# EAGLE board LilyPad_SimplePower_Panel_v21 (EAGLE 6.6.0), part 1 of 3
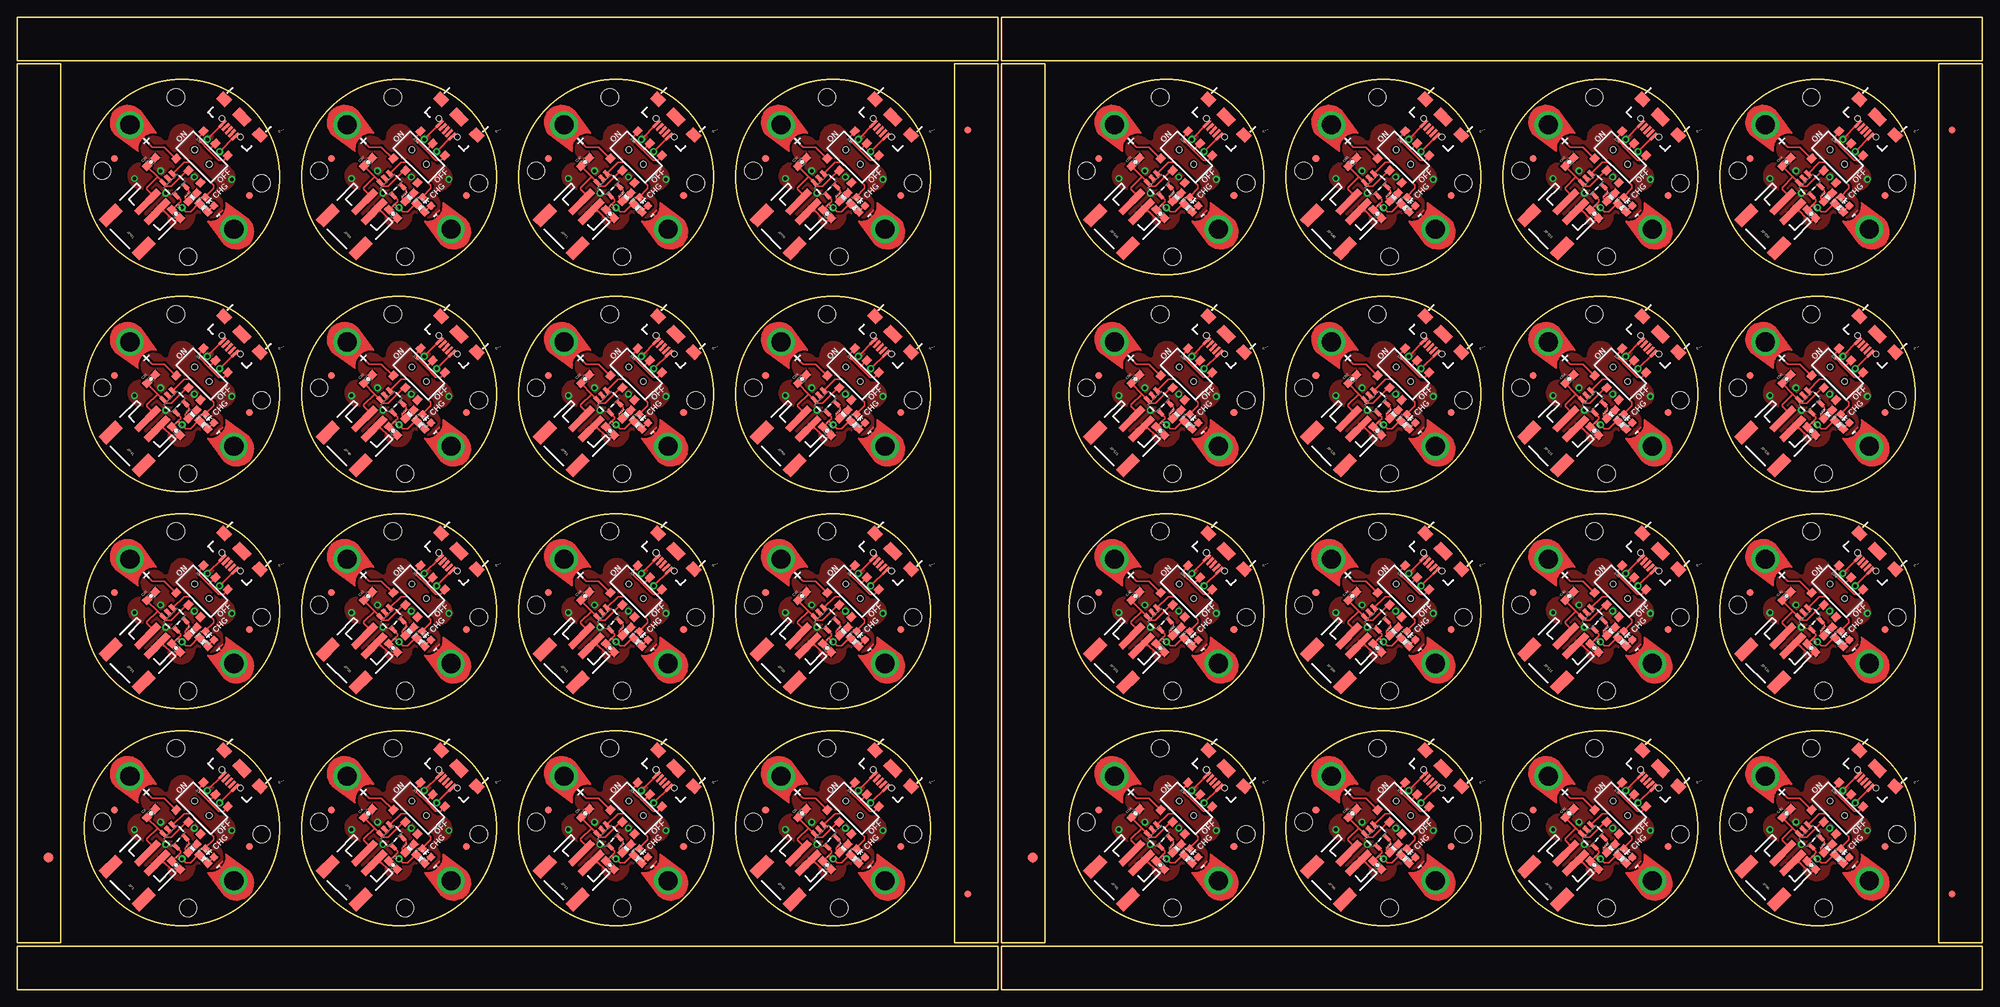
[diagram p0: board, top side]
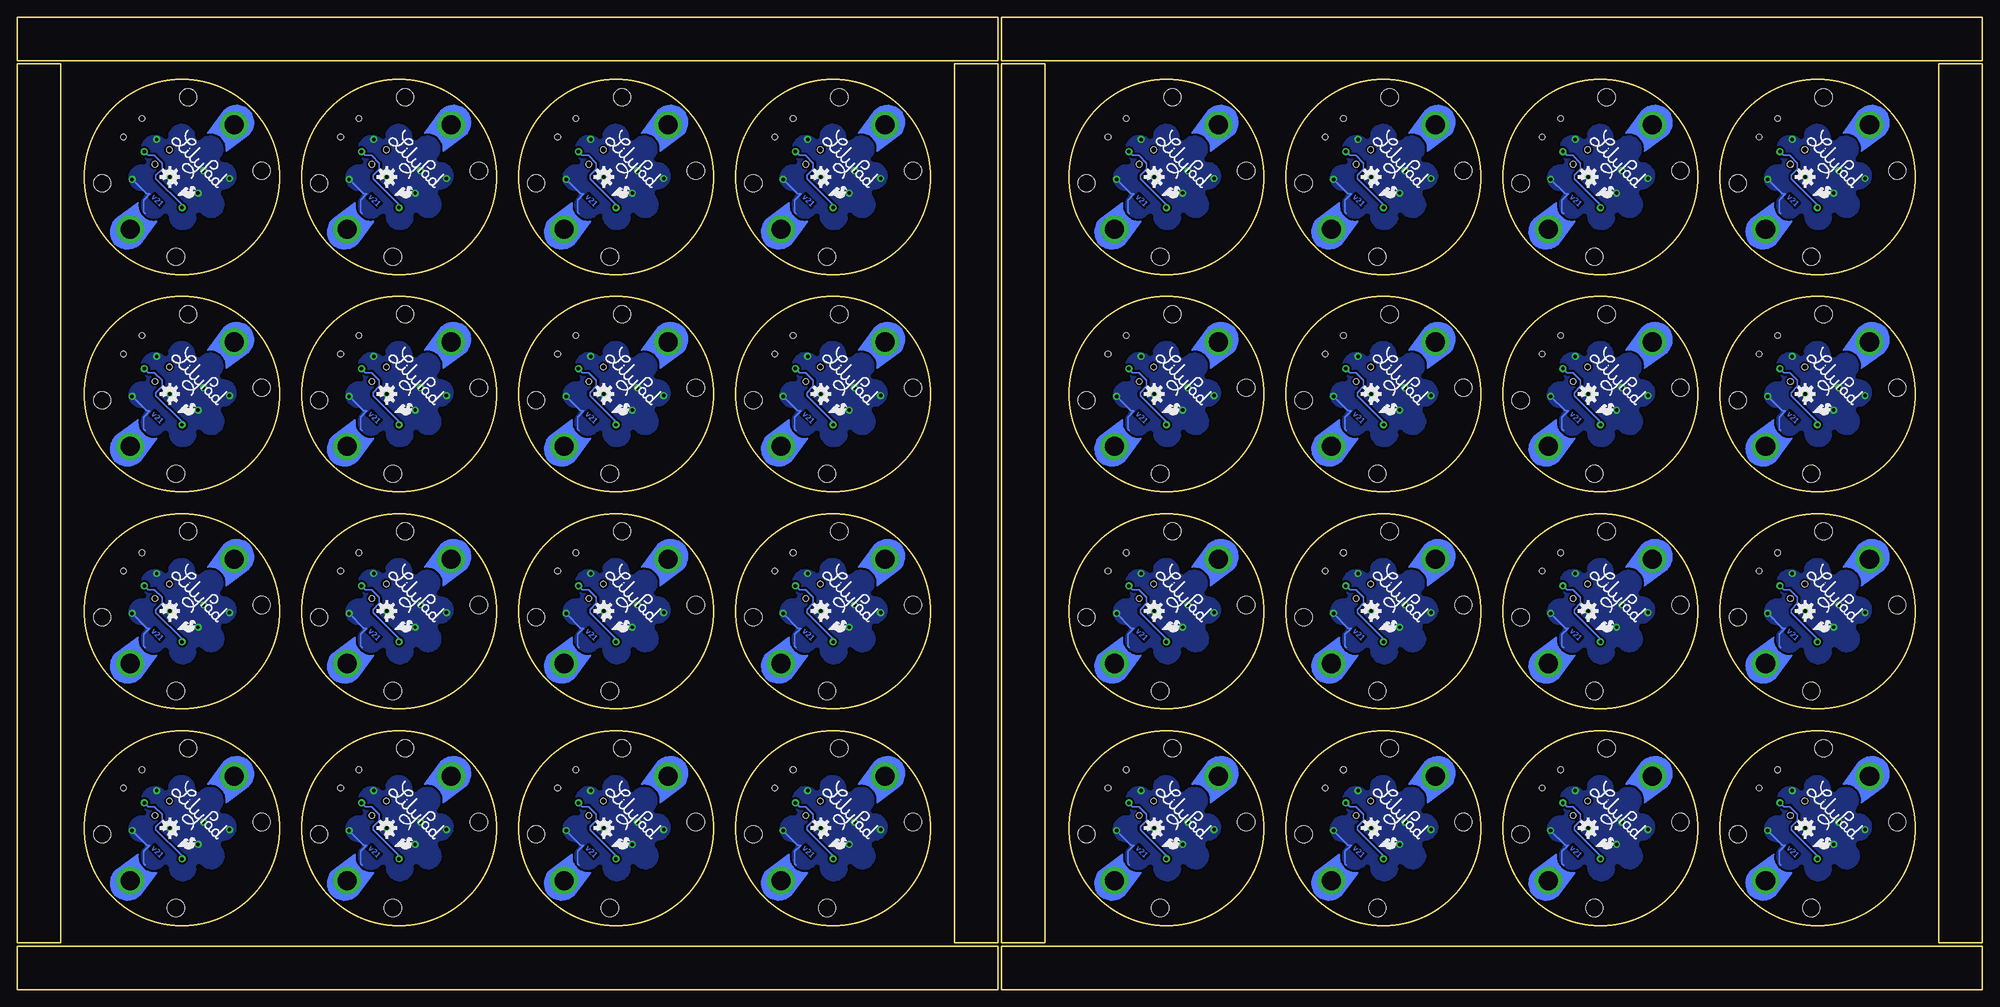
[diagram p1: board, bottom side, seen from below]

Size 287.53 x 142.24 mm. Coordinates in mm from the lower left corner, seen from the top.
Outline: 6.35,6.86 6.35,135.38 0,135.38 0,6.86 6.35,6.86
Outline: 0,0 143.51,0 143.51,6.35 0,6.35 0,0
Outline: 143.51,6.86 143.51,135.38 137.16,135.38 137.16,6.86 143.51,6.86
Outline: 143.51,142.24 0,142.24 0,135.89 143.51,135.89 143.51,142.24
Outline: 150.37,6.86 150.37,135.38 144.02,135.38 144.02,6.86 150.37,6.86
Outline: 144.02,0 287.53,0 287.53,6.35 144.02,6.35 144.02,0
Outline: 287.53,6.86 287.53,135.38 281.18,135.38 281.18,6.86 287.53,6.86
Outline: 287.53,142.24 144.02,142.24 144.02,135.89 287.53,135.89 287.53,142.24
Outline: circle at 24.13,23.6 radius 14.22
Outline: circle at 55.88,23.6 radius 14.22
Outline: circle at 87.63,23.6 radius 14.22
Outline: circle at 119.38,23.6 radius 14.22
Outline: circle at 24.13,55.35 radius 14.22
Outline: circle at 55.88,55.35 radius 14.22
Outline: circle at 87.63,55.35 radius 14.22
Outline: circle at 119.38,55.35 radius 14.22
Outline: circle at 24.13,87.1 radius 14.22
Outline: circle at 55.88,87.1 radius 14.22
Outline: circle at 87.63,87.1 radius 14.22
Outline: circle at 119.38,87.1 radius 14.22
Outline: circle at 24.13,118.85 radius 14.22
Outline: circle at 55.88,118.85 radius 14.22
Outline: circle at 87.63,118.85 radius 14.22
Outline: circle at 119.38,118.85 radius 14.22
Outline: circle at 168.15,23.6 radius 14.22
Outline: circle at 199.9,23.6 radius 14.22
Outline: circle at 231.65,23.6 radius 14.22
Outline: circle at 263.4,23.6 radius 14.22
Copper layers (1*16): Top 0.035mm / dielectric 1.5mm / Bottom 0.035mm
Design rules "SparkFun-2-layer": minimum track width 7mil, minimum drill 15mil, track to track 8mil, track to pad 8mil, pad to pad 8mil, via to via 8mil, smd to smd 8mil, copper to edge 8mil, drill to drill 8mil, minimum pad ring 12mil, minimum via ring 10mil, stop-mask expansion 4mil, vias tented up to drill 20mil, thermal gap 10mil
tRestrict: area 12.8,12.3 to 35.5,34.9; area 44.6,12.3 to 67.2,34.9; area 76.3,12.3 to 99,34.9; area 108.1,12.3 to 130.7,34.9; area 12.8,44 to 35.5,66.7; area 44.6,44 to 67.2,66.7; area 76.3,44 to 99,66.7; area 108.1,44 to 130.7,66.7; area 12.8,75.8 to 35.5,98.4; area 44.6,75.8 to 67.2,98.4; area 76.3,75.8 to 99,98.4; area 108.1,75.8 to 130.7,98.4; 20 more areas; 256 lines
bRestrict: area 12.8,12.3 to 35.5,34.9; area 44.6,12.3 to 67.2,34.9; area 76.3,12.3 to 99,34.9; area 108.1,12.3 to 130.7,34.9; area 12.8,44 to 35.5,66.7; area 44.6,44 to 67.2,66.7; area 76.3,44 to 99,66.7; area 108.1,44 to 130.7,66.7; area 12.8,75.8 to 35.5,98.4; area 44.6,75.8 to 67.2,98.4; area 76.3,75.8 to 99,98.4; area 108.1,75.8 to 130.7,98.4; 20 more areas; 256 lines

## Footprints (pad centres in the part's own frame; a part is rotated, then mirrored left to right if it is on the bottom)
0603-CAP = smd 1.1 x 1: 1 -0.85,0; 2 0.85,0
LED-0603 = smd 1 x 1: A 0,-0.877; C 0,0.877
FIDUCIAL-1.5X3 = smd 1.5 x 1.5: 1 0,0
FIDUCIAL-1X2 = smd 1 x 1: 1 0,0
JST-2-SMD = smd 1 x 4.6: 1 -1,-3.7; 2 1,-3.7 | smd 1.6 x 3.4: NC1 -3.4,1.5; NC2 3.4,1.5
PETAL-LONG-1-2SIDE = drill 2.794 pad 4.064: 1 0.03,0
USB-B-MICRO-SMD_V03 = smd 1.4 x 0.4: D+1 2.7,0; D-1 2.7,0.65; GND1 2.7,-1.3; ID1 2.7,-0.65; VBUS1 2.7,1.3 | smd 1.5 x 1.8: SHIELD1 0,3.7; SHIELD2 0,-3.7 | smd 1.5 x 2.5: SHIELD3 0,0 | hole 0.85: 2.2,1.9; 2.2,-1.9
0603-RES = smd 1.1 x 1: 1 -0.85,0; 2 0.85,0
AYZ0202 = smd 1 x 1.15: 1 -2.5,2.825; 2 0,2.825; 3 2.5,2.825; 4 -2.5,-2.825; 5 0,-2.825; 6 2.5,-2.825 | hole 0.85: 1.5,0; -1.5,0
SEW-HOLE-NO-PAD = hole 2.54: 0,0
SOT23-5 = smd 0.55 x 1.2: 1 -0.95,-1.3; 2 0,-1.3; 3 0.95,-1.3; 4 0.95,1.3; 5 -0.95,1.3

## Placement (x,y rotation side)
C1  4.7uF  [0603-CAP]  23.23,18.22 315 top
C2  4.7uF  [0603-CAP]  19.59,25.8 45 top
C3  4.7uF  [0603-CAP]  54.98,18.22 315 top
C4  4.7uF  [0603-CAP]  51.34,25.8 45 top
C5  4.7uF  [0603-CAP]  86.73,18.22 315 top
C6  4.7uF  [0603-CAP]  83.09,25.8 45 top
C7  4.7uF  [0603-CAP]  118.48,18.22 315 top
C8  4.7uF  [0603-CAP]  114.84,25.8 45 top
C9  4.7uF  [0603-CAP]  23.23,49.97 315 top
C10  4.7uF  [0603-CAP]  19.59,57.55 45 top
C11  4.7uF  [0603-CAP]  54.98,49.97 315 top
C12  4.7uF  [0603-CAP]  51.34,57.55 45 top
C13  4.7uF  [0603-CAP]  86.73,49.97 315 top
C14  4.7uF  [0603-CAP]  83.09,57.55 45 top
C15  4.7uF  [0603-CAP]  118.48,49.97 315 top
C16  4.7uF  [0603-CAP]  114.84,57.55 45 top
C17  4.7uF  [0603-CAP]  23.23,81.72 315 top
C18  4.7uF  [0603-CAP]  19.59,89.3 45 top
C19  4.7uF  [0603-CAP]  54.98,81.72 315 top
C20  4.7uF  [0603-CAP]  51.34,89.3 45 top
C21  4.7uF  [0603-CAP]  86.73,81.72 315 top
C22  4.7uF  [0603-CAP]  83.09,89.3 45 top
C23  4.7uF  [0603-CAP]  118.48,81.72 315 top
C24  4.7uF  [0603-CAP]  114.84,89.3 45 top
C25  4.7uF  [0603-CAP]  23.23,113.47 315 top
C26  4.7uF  [0603-CAP]  19.59,121.05 45 top
C27  4.7uF  [0603-CAP]  54.98,113.47 315 top
C28  4.7uF  [0603-CAP]  51.34,121.05 45 top
C29  4.7uF  [0603-CAP]  86.73,113.47 315 top
C30  4.7uF  [0603-CAP]  83.09,121.05 45 top
C31  4.7uF  [0603-CAP]  118.48,113.47 315 top
C32  4.7uF  [0603-CAP]  114.84,121.05 45 top
C33  4.7uF  [0603-CAP]  167.25,18.22 315 top
C34  4.7uF  [0603-CAP]  163.61,25.8 45 top
C35  4.7uF  [0603-CAP]  199,18.22 315 top
C36  4.7uF  [0603-CAP]  195.36,25.8 45 top
C37  4.7uF  [0603-CAP]  230.75,18.22 315 top
C38  4.7uF  [0603-CAP]  227.11,25.8 45 top
C39  4.7uF  [0603-CAP]  262.5,18.22 315 top
C40  4.7uF  [0603-CAP]  258.86,25.8 45 top
C41  4.7uF  [0603-CAP]  167.25,49.97 315 top
C42  4.7uF  [0603-CAP]  163.61,57.55 45 top
C43  4.7uF  [0603-CAP]  199,49.97 315 top
C44  4.7uF  [0603-CAP]  195.36,57.55 45 top
C45  4.7uF  [0603-CAP]  230.75,49.97 315 top
C46  4.7uF  [0603-CAP]  227.11,57.55 45 top
C47  4.7uF  [0603-CAP]  262.5,49.97 315 top
C48  4.7uF  [0603-CAP]  258.86,57.55 45 top
C49  4.7uF  [0603-CAP]  167.25,81.72 315 top
C50  4.7uF  [0603-CAP]  163.61,89.3 45 top
C51  4.7uF  [0603-CAP]  199,81.72 315 top
C52  4.7uF  [0603-CAP]  195.36,89.3 45 top
C53  4.7uF  [0603-CAP]  230.75,81.72 315 top
C54  4.7uF  [0603-CAP]  227.11,89.3 45 top
C55  4.7uF  [0603-CAP]  262.5,81.72 315 top
C56  4.7uF  [0603-CAP]  258.86,89.3 45 top
C57  4.7uF  [0603-CAP]  167.25,113.47 315 top
C58  4.7uF  [0603-CAP]  163.61,121.05 45 top
C59  4.7uF  [0603-CAP]  199,113.47 315 top
C60  4.7uF  [0603-CAP]  195.36,121.05 45 top
C61  4.7uF  [0603-CAP]  230.75,113.47 315 top
C62  4.7uF  [0603-CAP]  227.11,121.05 45 top
C63  4.7uF  [0603-CAP]  262.5,113.47 315 top
C64  4.7uF  [0603-CAP]  258.86,121.05 45 top
D1  Yellow  [LED-0603]  28.17,20.01 45 top
D2  Yellow  [LED-0603]  59.92,20.01 45 top
D3  Yellow  [LED-0603]  91.67,20.01 45 top
D4  Yellow  [LED-0603]  123.42,20.01 45 top
D5  Yellow  [LED-0603]  28.17,51.76 45 top
D6  Yellow  [LED-0603]  59.92,51.76 45 top
D7  Yellow  [LED-0603]  91.67,51.76 45 top
D8  Yellow  [LED-0603]  123.42,51.76 45 top
D9  Yellow  [LED-0603]  28.17,83.51 45 top
D10  Yellow  [LED-0603]  59.92,83.51 45 top
D11  Yellow  [LED-0603]  91.67,83.51 45 top
D12  Yellow  [LED-0603]  123.42,83.51 45 top
D13  Yellow  [LED-0603]  28.17,115.26 45 top
D14  Yellow  [LED-0603]  59.92,115.26 45 top
D15  Yellow  [LED-0603]  91.67,115.26 45 top
D16  Yellow  [LED-0603]  123.42,115.26 45 top
D17  Yellow  [LED-0603]  172.19,20.01 45 top
D18  Yellow  [LED-0603]  203.94,20.01 45 top
D19  Yellow  [LED-0603]  235.69,20.01 45 top
D20  Yellow  [LED-0603]  267.44,20.01 45 top
D21  Yellow  [LED-0603]  172.19,51.76 45 top
D22  Yellow  [LED-0603]  203.94,51.76 45 top
D23  Yellow  [LED-0603]  235.69,51.76 45 top
D24  Yellow  [LED-0603]  267.44,51.76 45 top
D25  Yellow  [LED-0603]  172.19,83.51 45 top
D26  Yellow  [LED-0603]  203.94,83.51 45 top
D27  Yellow  [LED-0603]  235.69,83.51 45 top
D28  Yellow  [LED-0603]  267.44,83.51 45 top
D29  Yellow  [LED-0603]  172.19,115.26 45 top
D30  Yellow  [LED-0603]  203.94,115.26 45 top
D31  Yellow  [LED-0603]  235.69,115.26 45 top
D32  Yellow  [LED-0603]  267.44,115.26 45 top
E$1  [FIDUCIAL-1.5X3]  4.57,19.3 0 top
E$2  [FIDUCIAL-1X2]  283.08,13.97 0 top
E$3  [FIDUCIAL-1X2]  283.08,125.73 180 top
E$4  [FIDUCIAL-1X2]  139.06,13.97 0 top
E$5  [FIDUCIAL-1X2]  139.06,125.73 180 top
E$6  [FIDUCIAL-1.5X3]  148.59,19.3 0 top
FID1  FIDUCIAL1X2  [FIDUCIAL-1X2]  14.25,26.3 45 top
FID2  FIDUCIAL1X2  [FIDUCIAL-1X2]  34.01,20.91 45 top
FID3  FIDUCIAL1X2  [FIDUCIAL-1X2]  46,26.3 45 top
FID4  FIDUCIAL1X2  [FIDUCIAL-1X2]  65.76,20.91 45 top
FID5  FIDUCIAL1X2  [FIDUCIAL-1X2]  77.75,26.3 45 top
FID6  FIDUCIAL1X2  [FIDUCIAL-1X2]  97.51,20.91 45 top
FID7  FIDUCIAL1X2  [FIDUCIAL-1X2]  109.5,26.3 45 top
FID8  FIDUCIAL1X2  [FIDUCIAL-1X2]  129.26,20.91 45 top
FID9  FIDUCIAL1X2  [FIDUCIAL-1X2]  14.25,58.05 45 top
FID10  FIDUCIAL1X2  [FIDUCIAL-1X2]  34.01,52.66 45 top
FID11  FIDUCIAL1X2  [FIDUCIAL-1X2]  46,58.05 45 top
FID12  FIDUCIAL1X2  [FIDUCIAL-1X2]  65.76,52.66 45 top
FID13  FIDUCIAL1X2  [FIDUCIAL-1X2]  77.75,58.05 45 top
FID14  FIDUCIAL1X2  [FIDUCIAL-1X2]  97.51,52.66 45 top
FID15  FIDUCIAL1X2  [FIDUCIAL-1X2]  109.5,58.05 45 top
FID16  FIDUCIAL1X2  [FIDUCIAL-1X2]  129.26,52.66 45 top
FID17  FIDUCIAL1X2  [FIDUCIAL-1X2]  14.25,89.8 45 top
FID18  FIDUCIAL1X2  [FIDUCIAL-1X2]  34.01,84.41 45 top
FID19  FIDUCIAL1X2  [FIDUCIAL-1X2]  46,89.8 45 top
FID20  FIDUCIAL1X2  [FIDUCIAL-1X2]  65.76,84.41 45 top
FID21  FIDUCIAL1X2  [FIDUCIAL-1X2]  77.75,89.8 45 top
FID22  FIDUCIAL1X2  [FIDUCIAL-1X2]  97.51,84.41 45 top
FID23  FIDUCIAL1X2  [FIDUCIAL-1X2]  109.5,89.8 45 top
FID24  FIDUCIAL1X2  [FIDUCIAL-1X2]  129.26,84.41 45 top
FID25  FIDUCIAL1X2  [FIDUCIAL-1X2]  14.25,121.55 45 top
FID26  FIDUCIAL1X2  [FIDUCIAL-1X2]  34.01,116.16 45 top
FID27  FIDUCIAL1X2  [FIDUCIAL-1X2]  46,121.55 45 top
FID28  FIDUCIAL1X2  [FIDUCIAL-1X2]  65.76,116.16 45 top
FID29  FIDUCIAL1X2  [FIDUCIAL-1X2]  77.75,121.55 45 top
FID30  FIDUCIAL1X2  [FIDUCIAL-1X2]  97.51,116.16 45 top
FID31  FIDUCIAL1X2  [FIDUCIAL-1X2]  109.5,121.55 45 top
FID32  FIDUCIAL1X2  [FIDUCIAL-1X2]  129.26,116.16 45 top
FID33  FIDUCIAL1X2  [FIDUCIAL-1X2]  158.27,26.3 45 top
FID34  FIDUCIAL1X2  [FIDUCIAL-1X2]  178.03,20.91 45 top
FID35  FIDUCIAL1X2  [FIDUCIAL-1X2]  190.02,26.3 45 top
FID36  FIDUCIAL1X2  [FIDUCIAL-1X2]  209.78,20.91 45 top
FID37  FIDUCIAL1X2  [FIDUCIAL-1X2]  221.77,26.3 45 top
FID38  FIDUCIAL1X2  [FIDUCIAL-1X2]  241.53,20.91 45 top
FID39  FIDUCIAL1X2  [FIDUCIAL-1X2]  253.52,26.3 45 top
FID40  FIDUCIAL1X2  [FIDUCIAL-1X2]  273.28,20.91 45 top
FID41  FIDUCIAL1X2  [FIDUCIAL-1X2]  158.27,58.05 45 top
FID42  FIDUCIAL1X2  [FIDUCIAL-1X2]  178.03,52.66 45 top
FID43  FIDUCIAL1X2  [FIDUCIAL-1X2]  190.02,58.05 45 top
FID44  FIDUCIAL1X2  [FIDUCIAL-1X2]  209.78,52.66 45 top
FID45  FIDUCIAL1X2  [FIDUCIAL-1X2]  221.77,58.05 45 top
FID46  FIDUCIAL1X2  [FIDUCIAL-1X2]  241.53,52.66 45 top
FID47  FIDUCIAL1X2  [FIDUCIAL-1X2]  253.52,58.05 45 top
FID48  FIDUCIAL1X2  [FIDUCIAL-1X2]  273.28,52.66 45 top
FID49  FIDUCIAL1X2  [FIDUCIAL-1X2]  158.27,89.8 45 top
FID50  FIDUCIAL1X2  [FIDUCIAL-1X2]  178.03,84.41 45 top
FID51  FIDUCIAL1X2  [FIDUCIAL-1X2]  190.02,89.8 45 top
FID52  FIDUCIAL1X2  [FIDUCIAL-1X2]  209.78,84.41 45 top
FID53  FIDUCIAL1X2  [FIDUCIAL-1X2]  221.77,89.8 45 top
FID54  FIDUCIAL1X2  [FIDUCIAL-1X2]  241.53,84.41 45 top
FID55  FIDUCIAL1X2  [FIDUCIAL-1X2]  253.52,89.8 45 top
FID56  FIDUCIAL1X2  [FIDUCIAL-1X2]  273.28,84.41 45 top
FID57  FIDUCIAL1X2  [FIDUCIAL-1X2]  158.27,121.55 45 top
FID58  FIDUCIAL1X2  [FIDUCIAL-1X2]  178.03,116.16 45 top
FID59  FIDUCIAL1X2  [FIDUCIAL-1X2]  190.02,121.55 45 top
FID60  FIDUCIAL1X2  [FIDUCIAL-1X2]  209.78,116.16 45 top
FID61  FIDUCIAL1X2  [FIDUCIAL-1X2]  221.77,121.55 45 top
FID62  FIDUCIAL1X2  [FIDUCIAL-1X2]  241.53,116.16 45 top
FID63  FIDUCIAL1X2  [FIDUCIAL-1X2]  253.52,121.55 45 top
FID64  FIDUCIAL1X2  [FIDUCIAL-1X2]  273.28,116.16 45 top
JP1  M02-JST-2MM-SMT  [JST-2-SMD]  17.17,16.64 135 top
JP2  SEWTAP9  [PETAL-LONG-1-2SIDE]  16.5,31.24 315 top
JP3  SEWTAP9  [PETAL-LONG-1-2SIDE]  31.75,15.92 135 top
JP4  USB_MICROB_PLUGCONN-11752  [USB-B-MICRO-SMD_V03]  32.89,32.36 225 top
JP5  SFE_LOGO_FLAME.1_INCH  [SFE_LOGO_FLAME_.1]  25.25,20.91 315 bottom
JP6  M02-JST-2MM-SMT  [JST-2-SMD]  48.92,16.64 135 top
JP7  SEWTAP9  [PETAL-LONG-1-2SIDE]  63.5,15.92 135 top
JP8  SEWTAP9  [PETAL-LONG-1-2SIDE]  48.25,31.24 315 top
JP9  SFE_LOGO_FLAME.1_INCH  [SFE_LOGO_FLAME_.1]  57,20.91 315 bottom
JP10  USB_MICROB_PLUGCONN-11752  [USB-B-MICRO-SMD_V03]  64.64,32.36 225 top
JP11  M02-JST-2MM-SMT  [JST-2-SMD]  80.67,16.64 135 top
JP12  SEWTAP9  [PETAL-LONG-1-2SIDE]  95.25,15.92 135 top
JP13  SEWTAP9  [PETAL-LONG-1-2SIDE]  80,31.24 315 top
JP14  SFE_LOGO_FLAME.1_INCH  [SFE_LOGO_FLAME_.1]  88.75,20.91 315 bottom
JP15  USB_MICROB_PLUGCONN-11752  [USB-B-MICRO-SMD_V03]  96.39,32.36 225 top
JP16  M02-JST-2MM-SMT  [JST-2-SMD]  112.42,16.64 135 top
JP17  SEWTAP9  [PETAL-LONG-1-2SIDE]  127,15.92 135 top
JP18  SEWTAP9  [PETAL-LONG-1-2SIDE]  111.75,31.24 315 top
JP19  SFE_LOGO_FLAME.1_INCH  [SFE_LOGO_FLAME_.1]  120.5,20.91 315 bottom
JP20  USB_MICROB_PLUGCONN-11752  [USB-B-MICRO-SMD_V03]  128.14,32.36 225 top
JP21  M02-JST-2MM-SMT  [JST-2-SMD]  17.17,48.39 135 top
JP22  SEWTAP9  [PETAL-LONG-1-2SIDE]  31.75,47.67 135 top
JP23  SEWTAP9  [PETAL-LONG-1-2SIDE]  16.5,62.99 315 top
JP24  SFE_LOGO_FLAME.1_INCH  [SFE_LOGO_FLAME_.1]  25.25,52.66 315 bottom
JP25  USB_MICROB_PLUGCONN-11752  [USB-B-MICRO-SMD_V03]  32.89,64.11 225 top
JP26  M02-JST-2MM-SMT  [JST-2-SMD]  48.92,48.39 135 top
JP27  SEWTAP9  [PETAL-LONG-1-2SIDE]  63.5,47.67 135 top
JP28  SEWTAP9  [PETAL-LONG-1-2SIDE]  48.25,62.99 315 top
JP29  SFE_LOGO_FLAME.1_INCH  [SFE_LOGO_FLAME_.1]  57,52.66 315 bottom
JP30  USB_MICROB_PLUGCONN-11752  [USB-B-MICRO-SMD_V03]  64.64,64.11 225 top
JP31  M02-JST-2MM-SMT  [JST-2-SMD]  80.67,48.39 135 top
JP32  SEWTAP9  [PETAL-LONG-1-2SIDE]  95.25,47.67 135 top
JP33  SEWTAP9  [PETAL-LONG-1-2SIDE]  80,62.99 315 top
JP34  SFE_LOGO_FLAME.1_INCH  [SFE_LOGO_FLAME_.1]  88.75,52.66 315 bottom
JP35  USB_MICROB_PLUGCONN-11752  [USB-B-MICRO-SMD_V03]  96.39,64.11 225 top
JP36  M02-JST-2MM-SMT  [JST-2-SMD]  112.42,48.39 135 top
JP37  SEWTAP9  [PETAL-LONG-1-2SIDE]  127,47.67 135 top
JP38  SEWTAP9  [PETAL-LONG-1-2SIDE]  111.75,62.99 315 top
JP39  SFE_LOGO_FLAME.1_INCH  [SFE_LOGO_FLAME_.1]  120.5,52.66 315 bottom
JP40  USB_MICROB_PLUGCONN-11752  [USB-B-MICRO-SMD_V03]  128.14,64.11 225 top
JP41  M02-JST-2MM-SMT  [JST-2-SMD]  17.17,80.14 135 top
JP42  SEWTAP9  [PETAL-LONG-1-2SIDE]  31.75,79.42 135 top
JP43  SEWTAP9  [PETAL-LONG-1-2SIDE]  16.5,94.74 315 top
JP44  SFE_LOGO_FLAME.1_INCH  [SFE_LOGO_FLAME_.1]  25.25,84.41 315 bottom
JP45  USB_MICROB_PLUGCONN-11752  [USB-B-MICRO-SMD_V03]  32.89,95.86 225 top
JP46  M02-JST-2MM-SMT  [JST-2-SMD]  48.92,80.14 135 top
JP47  SEWTAP9  [PETAL-LONG-1-2SIDE]  63.5,79.42 135 top
JP48  SEWTAP9  [PETAL-LONG-1-2SIDE]  48.25,94.74 315 top
JP49  SFE_LOGO_FLAME.1_INCH  [SFE_LOGO_FLAME_.1]  57,84.41 315 bottom
JP50  USB_MICROB_PLUGCONN-11752  [USB-B-MICRO-SMD_V03]  64.64,95.86 225 top
JP51  M02-JST-2MM-SMT  [JST-2-SMD]  80.67,80.14 135 top
JP52  SEWTAP9  [PETAL-LONG-1-2SIDE]  95.25,79.42 135 top
JP53  SEWTAP9  [PETAL-LONG-1-2SIDE]  80,94.74 315 top
JP54  SFE_LOGO_FLAME.1_INCH  [SFE_LOGO_FLAME_.1]  88.75,84.41 315 bottom
JP55  USB_MICROB_PLUGCONN-11752  [USB-B-MICRO-SMD_V03]  96.39,95.86 225 top
JP56  M02-JST-2MM-SMT  [JST-2-SMD]  112.42,80.14 135 top
JP57  SEWTAP9  [PETAL-LONG-1-2SIDE]  127,79.42 135 top
JP58  SEWTAP9  [PETAL-LONG-1-2SIDE]  111.75,94.74 315 top
JP59  SFE_LOGO_FLAME.1_INCH  [SFE_LOGO_FLAME_.1]  120.5,84.41 315 bottom
JP60  USB_MICROB_PLUGCONN-11752  [USB-B-MICRO-SMD_V03]  128.14,95.86 225 top
JP61  M02-JST-2MM-SMT  [JST-2-SMD]  17.17,111.89 135 top
JP62  SEWTAP9  [PETAL-LONG-1-2SIDE]  31.75,111.17 135 top
JP63  SEWTAP9  [PETAL-LONG-1-2SIDE]  16.5,126.49 315 top
JP64  SFE_LOGO_FLAME.1_INCH  [SFE_LOGO_FLAME_.1]  25.25,116.16 315 bottom
JP65  USB_MICROB_PLUGCONN-11752  [USB-B-MICRO-SMD_V03]  32.89,127.61 225 top
JP66  M02-JST-2MM-SMT  [JST-2-SMD]  48.92,111.89 135 top
JP67  SEWTAP9  [PETAL-LONG-1-2SIDE]  63.5,111.17 135 top
JP68  SEWTAP9  [PETAL-LONG-1-2SIDE]  48.25,126.49 315 top
JP69  SFE_LOGO_FLAME.1_INCH  [SFE_LOGO_FLAME_.1]  57,116.16 315 bottom
JP70  USB_MICROB_PLUGCONN-11752  [USB-B-MICRO-SMD_V03]  64.64,127.61 225 top
JP71  M02-JST-2MM-SMT  [JST-2-SMD]  80.67,111.89 135 top
JP72  SEWTAP9  [PETAL-LONG-1-2SIDE]  95.25,111.17 135 top
JP73  SEWTAP9  [PETAL-LONG-1-2SIDE]  80,126.49 315 top
JP74  SFE_LOGO_FLAME.1_INCH  [SFE_LOGO_FLAME_.1]  88.75,116.16 315 bottom
JP75  USB_MICROB_PLUGCONN-11752  [USB-B-MICRO-SMD_V03]  96.39,127.61 225 top
JP76  M02-JST-2MM-SMT  [JST-2-SMD]  112.42,111.89 135 top
JP77  SEWTAP9  [PETAL-LONG-1-2SIDE]  127,111.17 135 top
JP78  SEWTAP9  [PETAL-LONG-1-2SIDE]  111.75,126.49 315 top
JP79  SFE_LOGO_FLAME.1_INCH  [SFE_LOGO_FLAME_.1]  120.5,116.16 315 bottom
JP80  USB_MICROB_PLUGCONN-11752  [USB-B-MICRO-SMD_V03]  128.14,127.61 225 top
JP81  M02-JST-2MM-SMT  [JST-2-SMD]  161.19,16.64 135 top
JP82  SEWTAP9  [PETAL-LONG-1-2SIDE]  175.77,15.92 135 top
JP83  SEWTAP9  [PETAL-LONG-1-2SIDE]  160.51,31.24 315 top
JP84  SFE_LOGO_FLAME.1_INCH  [SFE_LOGO_FLAME_.1]  169.27,20.91 315 bottom
JP85  USB_MICROB_PLUGCONN-11752  [USB-B-MICRO-SMD_V03]  176.9,32.36 225 top
JP86  M02-JST-2MM-SMT  [JST-2-SMD]  192.94,16.64 135 top
JP87  SEWTAP9  [PETAL-LONG-1-2SIDE]  207.52,15.92 135 top
JP88  SEWTAP9  [PETAL-LONG-1-2SIDE]  192.26,31.24 315 top
JP89  SFE_LOGO_FLAME.1_INCH  [SFE_LOGO_FLAME_.1]  201.02,20.91 315 bottom
JP90  USB_MICROB_PLUGCONN-11752  [USB-B-MICRO-SMD_V03]  208.65,32.36 225 top
JP91  M02-JST-2MM-SMT  [JST-2-SMD]  224.69,16.64 135 top
JP92  SEWTAP9  [PETAL-LONG-1-2SIDE]  239.27,15.92 135 top
JP93  SEWTAP9  [PETAL-LONG-1-2SIDE]  224.01,31.24 315 top
JP94  SFE_LOGO_FLAME.1_INCH  [SFE_LOGO_FLAME_.1]  232.77,20.91 315 bottom
JP95  USB_MICROB_PLUGCONN-11752  [USB-B-MICRO-SMD_V03]  240.4,32.36 225 top
JP96  M02-JST-2MM-SMT  [JST-2-SMD]  256.44,16.64 135 top
JP97  SEWTAP9  [PETAL-LONG-1-2SIDE]  271.02,15.92 135 top
JP98  SEWTAP9  [PETAL-LONG-1-2SIDE]  255.76,31.24 315 top
JP99  SFE_LOGO_FLAME.1_INCH  [SFE_LOGO_FLAME_.1]  264.52,20.91 315 bottom
JP100  USB_MICROB_PLUGCONN-11752  [USB-B-MICRO-SMD_V03]  272.15,32.36 225 top
JP101  M02-JST-2MM-SMT  [JST-2-SMD]  161.19,48.39 135 top
JP102  SEWTAP9  [PETAL-LONG-1-2SIDE]  175.77,47.67 135 top
JP103  SEWTAP9  [PETAL-LONG-1-2SIDE]  160.51,62.99 315 top
JP104  SFE_LOGO_FLAME.1_INCH  [SFE_LOGO_FLAME_.1]  169.27,52.66 315 bottom
JP105  USB_MICROB_PLUGCONN-11752  [USB-B-MICRO-SMD_V03]  176.9,64.11 225 top
JP106  M02-JST-2MM-SMT  [JST-2-SMD]  192.94,48.39 135 top
JP107  SEWTAP9  [PETAL-LONG-1-2SIDE]  207.52,47.67 135 top
JP108  SEWTAP9  [PETAL-LONG-1-2SIDE]  192.26,62.99 315 top
JP109  SFE_LOGO_FLAME.1_INCH  [SFE_LOGO_FLAME_.1]  201.02,52.66 315 bottom
JP110  USB_MICROB_PLUGCONN-11752  [USB-B-MICRO-SMD_V03]  208.65,64.11 225 top
JP111  M02-JST-2MM-SMT  [JST-2-SMD]  224.69,48.39 135 top
JP112  SEWTAP9  [PETAL-LONG-1-2SIDE]  239.27,47.67 135 top
JP113  SEWTAP9  [PETAL-LONG-1-2SIDE]  224.01,62.99 315 top
JP114  SFE_LOGO_FLAME.1_INCH  [SFE_LOGO_FLAME_.1]  232.77,52.66 315 bottom
JP115  USB_MICROB_PLUGCONN-11752  [USB-B-MICRO-SMD_V03]  240.4,64.11 225 top
JP116  M02-JST-2MM-SMT  [JST-2-SMD]  256.44,48.39 135 top
JP117  SEWTAP9  [PETAL-LONG-1-2SIDE]  271.02,47.67 135 top
JP118  SEWTAP9  [PETAL-LONG-1-2SIDE]  255.76,62.99 315 top
JP119  SFE_LOGO_FLAME.1_INCH  [SFE_LOGO_FLAME_.1]  264.52,52.66 315 bottom
JP120  USB_MICROB_PLUGCONN-11752  [USB-B-MICRO-SMD_V03]  272.15,64.11 225 top
JP121  M02-JST-2MM-SMT  [JST-2-SMD]  161.19,80.14 135 top
JP122  SEWTAP9  [PETAL-LONG-1-2SIDE]  175.77,79.42 135 top
JP123  SEWTAP9  [PETAL-LONG-1-2SIDE]  160.51,94.74 315 top
JP124  SFE_LOGO_FLAME.1_INCH  [SFE_LOGO_FLAME_.1]  169.27,84.41 315 bottom
JP125  USB_MICROB_PLUGCONN-11752  [USB-B-MICRO-SMD_V03]  176.9,95.86 225 top
JP126  M02-JST-2MM-SMT  [JST-2-SMD]  192.94,80.14 135 top
JP127  SEWTAP9  [PETAL-LONG-1-2SIDE]  207.52,79.42 135 top
JP128  SEWTAP9  [PETAL-LONG-1-2SIDE]  192.26,94.74 315 top
JP129  SFE_LOGO_FLAME.1_INCH  [SFE_LOGO_FLAME_.1]  201.02,84.41 315 bottom
JP130  USB_MICROB_PLUGCONN-11752  [USB-B-MICRO-SMD_V03]  208.65,95.86 225 top
JP131  M02-JST-2MM-SMT  [JST-2-SMD]  224.69,80.14 135 top
JP132  SEWTAP9  [PETAL-LONG-1-2SIDE]  239.27,79.42 135 top
JP133  SEWTAP9  [PETAL-LONG-1-2SIDE]  224.01,94.74 315 top
JP134  SFE_LOGO_FLAME.1_INCH  [SFE_LOGO_FLAME_.1]  232.77,84.41 315 bottom
JP135  USB_MICROB_PLUGCONN-11752  [USB-B-MICRO-SMD_V03]  240.4,95.86 225 top
JP136  M02-JST-2MM-SMT  [JST-2-SMD]  256.44,80.14 135 top
JP137  SEWTAP9  [PETAL-LONG-1-2SIDE]  271.02,79.42 135 top
JP138  SEWTAP9  [PETAL-LONG-1-2SIDE]  255.76,94.74 315 top
JP139  SFE_LOGO_FLAME.1_INCH  [SFE_LOGO_FLAME_.1]  264.52,84.41 315 bottom
JP140  USB_MICROB_PLUGCONN-11752  [USB-B-MICRO-SMD_V03]  272.15,95.86 225 top
JP141  M02-JST-2MM-SMT  [JST-2-SMD]  161.19,111.89 135 top
JP142  SEWTAP9  [PETAL-LONG-1-2SIDE]  175.77,111.17 135 top
JP143  SEWTAP9  [PETAL-LONG-1-2SIDE]  160.51,126.49 315 top
JP144  SFE_LOGO_FLAME.1_INCH  [SFE_LOGO_FLAME_.1]  169.27,116.16 315 bottom
JP145  USB_MICROB_PLUGCONN-11752  [USB-B-MICRO-SMD_V03]  176.9,127.61 225 top
JP146  M02-JST-2MM-SMT  [JST-2-SMD]  192.94,111.89 135 top
JP147  SEWTAP9  [PETAL-LONG-1-2SIDE]  207.52,111.17 135 top
JP148  SEWTAP9  [PETAL-LONG-1-2SIDE]  192.26,126.49 315 top
JP149  SFE_LOGO_FLAME.1_INCH  [SFE_LOGO_FLAME_.1]  201.02,116.16 315 bottom
JP150  USB_MICROB_PLUGCONN-11752  [USB-B-MICRO-SMD_V03]  208.65,127.61 225 top
JP151  M02-JST-2MM-SMT  [JST-2-SMD]  224.69,111.89 135 top
JP152  SEWTAP9  [PETAL-LONG-1-2SIDE]  239.27,111.17 135 top
JP153  SEWTAP9  [PETAL-LONG-1-2SIDE]  224.01,126.49 315 top
JP154  SFE_LOGO_FLAME.1_INCH  [SFE_LOGO_FLAME_.1]  232.77,116.16 315 bottom
JP155  USB_MICROB_PLUGCONN-11752  [USB-B-MICRO-SMD_V03]  240.4,127.61 225 top
JP156  M02-JST-2MM-SMT  [JST-2-SMD]  256.44,111.89 135 top
JP157  SEWTAP9  [PETAL-LONG-1-2SIDE]  271.02,111.17 135 top
JP158  SEWTAP9  [PETAL-LONG-1-2SIDE]  255.76,126.49 315 top
JP159  SFE_LOGO_FLAME.1_INCH  [SFE_LOGO_FLAME_.1]  264.52,116.16 315 bottom
JP160  USB_MICROB_PLUGCONN-11752  [USB-B-MICRO-SMD_V03]  272.15,127.61 225 top
R1  330  [0603-RES]  59.02,19.11 315 top
R2  2.0k  [0603-RES]  57.41,20.64 225 top
R3  330  [0603-RES]  27.27,19.11 315 top
R4  2.0k  [0603-RES]  25.66,20.64 225 top
R5  330  [0603-RES]  90.77,19.11 315 top
R6  2.0k  [0603-RES]  89.16,20.64 225 top
R7  330  [0603-RES]  122.52,19.11 315 top
R8  2.0k  [0603-RES]  120.91,20.64 225 top
R9  330  [0603-RES]  27.27,50.86 315 top
R10  2.0k  [0603-RES]  25.66,52.39 225 top
R11  330  [0603-RES]  59.02,50.86 315 top
R12  2.0k  [0603-RES]  57.41,52.39 225 top
R13  330  [0603-RES]  90.77,50.86 315 top
R14  2.0k  [0603-RES]  89.16,52.39 225 top
R15  330  [0603-RES]  122.52,50.86 315 top
R16  2.0k  [0603-RES]  120.91,52.39 225 top
R17  330  [0603-RES]  27.27,82.61 315 top
R18  2.0k  [0603-RES]  25.66,84.14 225 top
R19  330  [0603-RES]  59.02,82.61 315 top
R20  2.0k  [0603-RES]  57.41,84.14 225 top
R21  330  [0603-RES]  90.77,82.61 315 top
R22  2.0k  [0603-RES]  89.16,84.14 225 top
R23  330  [0603-RES]  122.52,82.61 315 top
R24  2.0k  [0603-RES]  120.91,84.14 225 top
R25  330  [0603-RES]  27.27,114.36 315 top
R26  2.0k  [0603-RES]  25.66,115.89 225 top
R27  330  [0603-RES]  59.02,114.36 315 top
R28  2.0k  [0603-RES]  57.41,115.89 225 top
R29  330  [0603-RES]  90.77,114.36 315 top
R30  2.0k  [0603-RES]  89.16,115.89 225 top
R31  330  [0603-RES]  122.52,114.36 315 top
R32  2.0k  [0603-RES]  120.91,115.89 225 top
R33  330  [0603-RES]  171.29,19.11 315 top
R34  2.0k  [0603-RES]  169.67,20.64 225 top
R35  330  [0603-RES]  203.04,19.11 315 top
R36  2.0k  [0603-RES]  201.42,20.64 225 top
R37  330  [0603-RES]  234.79,19.11 315 top
R38  2.0k  [0603-RES]  233.17,20.64 225 top
R39  330  [0603-RES]  266.54,19.11 315 top
R40  2.0k  [0603-RES]  264.92,20.64 225 top
R41  330  [0603-RES]  171.29,50.86 315 top
R42  2.0k  [0603-RES]  169.67,52.39 225 top
R43  330  [0603-RES]  203.04,50.86 315 top
R44  2.0k  [0603-RES]  201.42,52.39 225 top
R45  330  [0603-RES]  234.79,50.86 315 top
R46  2.0k  [0603-RES]  233.17,52.39 225 top
R47  330  [0603-RES]  266.54,50.86 315 top
R48  2.0k  [0603-RES]  264.92,52.39 225 top
R49  330  [0603-RES]  171.29,82.61 315 top
R50  2.0k  [0603-RES]  169.67,84.14 225 top
R51  330  [0603-RES]  203.04,82.61 315 top
R52  2.0k  [0603-RES]  201.42,84.14 225 top
R53  330  [0603-RES]  234.79,82.61 315 top
R54  2.0k  [0603-RES]  233.17,84.14 225 top
R55  330  [0603-RES]  266.54,82.61 315 top
R56  2.0k  [0603-RES]  264.92,84.14 225 top
R57  330  [0603-RES]  171.29,114.36 315 top
R58  2.0k  [0603-RES]  169.67,115.89 225 top
R59  330  [0603-RES]  203.04,114.36 315 top
R60  2.0k  [0603-RES]  201.42,115.89 225 top
R61  330  [0603-RES]  234.79,114.36 315 top
R62  2.0k  [0603-RES]  233.17,115.89 225 top
R63  330  [0603-RES]  266.54,114.36 315 top
R64  2.0k  [0603-RES]  264.92,115.89 225 top
S1  DPDT  [AYZ0202]  27.05,26.52 315 top
S2  DPDT  [AYZ0202]  58.8,26.52 315 top
S3  DPDT  [AYZ0202]  90.55,26.52 315 top
S4  DPDT  [AYZ0202]  122.3,26.52 315 top
S5  DPDT  [AYZ0202]  27.05,58.27 315 top
S6  DPDT  [AYZ0202]  58.8,58.27 315 top
S7  DPDT  [AYZ0202]  90.55,58.27 315 top
S8  DPDT  [AYZ0202]  122.3,58.27 315 top
S9  DPDT  [AYZ0202]  27.05,90.02 315 top
S10  DPDT  [AYZ0202]  58.8,90.02 315 top
S11  DPDT  [AYZ0202]  90.55,90.02 315 top
S12  DPDT  [AYZ0202]  122.3,90.02 315 top
S13  DPDT  [AYZ0202]  27.05,121.77 315 top
S14  DPDT  [AYZ0202]  58.8,121.77 315 top
S15  DPDT  [AYZ0202]  90.55,121.77 315 top
S16  DPDT  [AYZ0202]  122.3,121.77 315 top
S17  DPDT  [AYZ0202]  171.07,26.52 315 top
S18  DPDT  [AYZ0202]  202.82,26.52 315 top
S19  DPDT  [AYZ0202]  234.57,26.52 315 top
S20  DPDT  [AYZ0202]  266.32,26.52 315 top
S21  DPDT  [AYZ0202]  171.07,58.27 315 top
S22  DPDT  [AYZ0202]  202.82,58.27 315 top
S23  DPDT  [AYZ0202]  234.57,58.27 315 top
S24  DPDT  [AYZ0202]  266.32,58.27 315 top
S25  DPDT  [AYZ0202]  171.07,90.02 315 top
S26  DPDT  [AYZ0202]  202.82,90.02 315 top
S27  DPDT  [AYZ0202]  234.57,90.02 315 top
S28  DPDT  [AYZ0202]  266.32,90.02 315 top
S29  DPDT  [AYZ0202]  171.07,121.77 315 top
S30  DPDT  [AYZ0202]  202.82,121.77 315 top
S31  DPDT  [AYZ0202]  234.57,121.77 315 top
S32  DPDT  [AYZ0202]  266.32,121.77 315 top
STANDOFF1  SEW-HOLE-NO-PAD  [SEW-HOLE-NO-PAD]  12.46,24.5 45 top
STANDOFF2  SEW-HOLE-NO-PAD  [SEW-HOLE-NO-PAD]  23.23,35.28 45 top
STANDOFF3  SEW-HOLE-NO-PAD  [SEW-HOLE-NO-PAD]  35.8,22.71 45 top
STANDOFF4  SEW-HOLE-NO-PAD  [SEW-HOLE-NO-PAD]  25.03,11.93 45 top
STANDOFF5  SEW-HOLE-NO-PAD  [SEW-HOLE-NO-PAD]  44.21,24.5 45 top
STANDOFF6  SEW-HOLE-NO-PAD  [SEW-HOLE-NO-PAD]  54.98,35.28 45 top
STANDOFF7  SEW-HOLE-NO-PAD  [SEW-HOLE-NO-PAD]  67.55,22.71 45 top
STANDOFF8  SEW-HOLE-NO-PAD  [SEW-HOLE-NO-PAD]  56.78,11.93 45 top
STANDOFF9  SEW-HOLE-NO-PAD  [SEW-HOLE-NO-PAD]  75.96,24.5 45 top
STANDOFF10  SEW-HOLE-NO-PAD  [SEW-HOLE-NO-PAD]  86.73,35.28 45 top
STANDOFF11  SEW-HOLE-NO-PAD  [SEW-HOLE-NO-PAD]  99.3,22.71 45 top
STANDOFF12  SEW-HOLE-NO-PAD  [SEW-HOLE-NO-PAD]  88.53,11.93 45 top
STANDOFF13  SEW-HOLE-NO-PAD  [SEW-HOLE-NO-PAD]  107.71,24.5 45 top
STANDOFF14  SEW-HOLE-NO-PAD  [SEW-HOLE-NO-PAD]  118.48,35.28 45 top
STANDOFF15  SEW-HOLE-NO-PAD  [SEW-HOLE-NO-PAD]  131.05,22.71 45 top
STANDOFF16  SEW-HOLE-NO-PAD  [SEW-HOLE-NO-PAD]  120.28,11.93 45 top
STANDOFF17  SEW-HOLE-NO-PAD  [SEW-HOLE-NO-PAD]  12.46,56.25 45 top
STANDOFF18  SEW-HOLE-NO-PAD  [SEW-HOLE-NO-PAD]  23.23,67.03 45 top
STANDOFF19  SEW-HOLE-NO-PAD  [SEW-HOLE-NO-PAD]  35.8,54.46 45 top
STANDOFF20  SEW-HOLE-NO-PAD  [SEW-HOLE-NO-PAD]  25.03,43.68 45 top
STANDOFF21  SEW-HOLE-NO-PAD  [SEW-HOLE-NO-PAD]  44.21,56.25 45 top
STANDOFF22  SEW-HOLE-NO-PAD  [SEW-HOLE-NO-PAD]  54.98,67.03 45 top
STANDOFF23  SEW-HOLE-NO-PAD  [SEW-HOLE-NO-PAD]  67.55,54.46 45 top
STANDOFF24  SEW-HOLE-NO-PAD  [SEW-HOLE-NO-PAD]  56.78,43.68 45 top
STANDOFF25  SEW-HOLE-NO-PAD  [SEW-HOLE-NO-PAD]  75.96,56.25 45 top
STANDOFF26  SEW-HOLE-NO-PAD  [SEW-HOLE-NO-PAD]  86.73,67.03 45 top
STANDOFF27  SEW-HOLE-NO-PAD  [SEW-HOLE-NO-PAD]  99.3,54.46 45 top
STANDOFF28  SEW-HOLE-NO-PAD  [SEW-HOLE-NO-PAD]  88.53,43.68 45 top
STANDOFF29  SEW-HOLE-NO-PAD  [SEW-HOLE-NO-PAD]  107.71,56.25 45 top
STANDOFF30  SEW-HOLE-NO-PAD  [SEW-HOLE-NO-PAD]  118.48,67.03 45 top
STANDOFF31  SEW-HOLE-NO-PAD  [SEW-HOLE-NO-PAD]  131.05,54.46 45 top
STANDOFF32  SEW-HOLE-NO-PAD  [SEW-HOLE-NO-PAD]  120.28,43.68 45 top
STANDOFF33  SEW-HOLE-NO-PAD  [SEW-HOLE-NO-PAD]  12.46,88 45 top
STANDOFF34  SEW-HOLE-NO-PAD  [SEW-HOLE-NO-PAD]  23.23,98.78 45 top
STANDOFF35  SEW-HOLE-NO-PAD  [SEW-HOLE-NO-PAD]  35.8,86.21 45 top
STANDOFF36  SEW-HOLE-NO-PAD  [SEW-HOLE-NO-PAD]  25.03,75.43 45 top
STANDOFF37  SEW-HOLE-NO-PAD  [SEW-HOLE-NO-PAD]  44.21,88 45 top
STANDOFF38  SEW-HOLE-NO-PAD  [SEW-HOLE-NO-PAD]  54.98,98.78 45 top
STANDOFF39  SEW-HOLE-NO-PAD  [SEW-HOLE-NO-PAD]  67.55,86.21 45 top
STANDOFF40  SEW-HOLE-NO-PAD  [SEW-HOLE-NO-PAD]  56.78,75.43 45 top
STANDOFF41  SEW-HOLE-NO-PAD  [SEW-HOLE-NO-PAD]  75.96,88 45 top
STANDOFF42  SEW-HOLE-NO-PAD  [SEW-HOLE-NO-PAD]  86.73,98.78 45 top
STANDOFF43  SEW-HOLE-NO-PAD  [SEW-HOLE-NO-PAD]  99.3,86.21 45 top
STANDOFF44  SEW-HOLE-NO-PAD  [SEW-HOLE-NO-PAD]  88.53,75.43 45 top
STANDOFF45  SEW-HOLE-NO-PAD  [SEW-HOLE-NO-PAD]  107.71,88 45 top
STANDOFF46  SEW-HOLE-NO-PAD  [SEW-HOLE-NO-PAD]  118.48,98.78 45 top
STANDOFF47  SEW-HOLE-NO-PAD  [SEW-HOLE-NO-PAD]  131.05,86.21 45 top
STANDOFF48  SEW-HOLE-NO-PAD  [SEW-HOLE-NO-PAD]  120.28,75.43 45 top
STANDOFF49  SEW-HOLE-NO-PAD  [SEW-HOLE-NO-PAD]  12.46,119.75 45 top
STANDOFF50  SEW-HOLE-NO-PAD  [SEW-HOLE-NO-PAD]  23.23,130.53 45 top
STANDOFF51  SEW-HOLE-NO-PAD  [SEW-HOLE-NO-PAD]  35.8,117.96 45 top
STANDOFF52  SEW-HOLE-NO-PAD  [SEW-HOLE-NO-PAD]  25.03,107.18 45 top
STANDOFF53  SEW-HOLE-NO-PAD  [SEW-HOLE-NO-PAD]  44.21,119.75 45 top
STANDOFF54  SEW-HOLE-NO-PAD  [SEW-HOLE-NO-PAD]  54.98,130.53 45 top
STANDOFF55  SEW-HOLE-NO-PAD  [SEW-HOLE-NO-PAD]  67.55,117.96 45 top
STANDOFF56  SEW-HOLE-NO-PAD  [SEW-HOLE-NO-PAD]  56.78,107.18 45 top
STANDOFF57  SEW-HOLE-NO-PAD  [SEW-HOLE-NO-PAD]  75.96,119.75 45 top
STANDOFF58  SEW-HOLE-NO-PAD  [SEW-HOLE-NO-PAD]  86.73,130.53 45 top
STANDOFF59  SEW-HOLE-NO-PAD  [SEW-HOLE-NO-PAD]  99.3,117.96 45 top
STANDOFF60  SEW-HOLE-NO-PAD  [SEW-HOLE-NO-PAD]  88.53,107.18 45 top
STANDOFF61  SEW-HOLE-NO-PAD  [SEW-HOLE-NO-PAD]  107.71,119.75 45 top
STANDOFF62  SEW-HOLE-NO-PAD  [SEW-HOLE-NO-PAD]  118.48,130.53 45 top
STANDOFF63  SEW-HOLE-NO-PAD  [SEW-HOLE-NO-PAD]  131.05,117.96 45 top
STANDOFF64  SEW-HOLE-NO-PAD  [SEW-HOLE-NO-PAD]  120.28,107.18 45 top
STANDOFF65  SEW-HOLE-NO-PAD  [SEW-HOLE-NO-PAD]  156.47,24.5 45 top
STANDOFF66  SEW-HOLE-NO-PAD  [SEW-HOLE-NO-PAD]  167.25,35.28 45 top
STANDOFF67  SEW-HOLE-NO-PAD  [SEW-HOLE-NO-PAD]  179.82,22.71 45 top
STANDOFF68  SEW-HOLE-NO-PAD  [SEW-HOLE-NO-PAD]  169.05,11.93 45 top
STANDOFF69  SEW-HOLE-NO-PAD  [SEW-HOLE-NO-PAD]  188.22,24.5 45 top
STANDOFF70  SEW-HOLE-NO-PAD  [SEW-HOLE-NO-PAD]  199,35.28 45 top
STANDOFF71  SEW-HOLE-NO-PAD  [SEW-HOLE-NO-PAD]  211.57,22.71 45 top
STANDOFF72  SEW-HOLE-NO-PAD  [SEW-HOLE-NO-PAD]  200.8,11.93 45 top
STANDOFF73  SEW-HOLE-NO-PAD  [SEW-HOLE-NO-PAD]  219.97,24.5 45 top
STANDOFF74  SEW-HOLE-NO-PAD  [SEW-HOLE-NO-PAD]  230.75,35.28 45 top
STANDOFF75  SEW-HOLE-NO-PAD  [SEW-HOLE-NO-PAD]  243.32,22.71 45 top
STANDOFF76  SEW-HOLE-NO-PAD  [SEW-HOLE-NO-PAD]  232.55,11.93 45 top
STANDOFF77  SEW-HOLE-NO-PAD  [SEW-HOLE-NO-PAD]  251.72,24.5 45 top
STANDOFF78  SEW-HOLE-NO-PAD  [SEW-HOLE-NO-PAD]  262.5,35.28 45 top
STANDOFF79  SEW-HOLE-NO-PAD  [SEW-HOLE-NO-PAD]  275.07,22.71 45 top
STANDOFF80  SEW-HOLE-NO-PAD  [SEW-HOLE-NO-PAD]  264.3,11.93 45 top
STANDOFF81  SEW-HOLE-NO-PAD  [SEW-HOLE-NO-PAD]  156.47,56.25 45 top
STANDOFF82  SEW-HOLE-NO-PAD  [SEW-HOLE-NO-PAD]  167.25,67.03 45 top
STANDOFF83  SEW-HOLE-NO-PAD  [SEW-HOLE-NO-PAD]  179.82,54.46 45 top
STANDOFF84  SEW-HOLE-NO-PAD  [SEW-HOLE-NO-PAD]  169.05,43.68 45 top
STANDOFF85  SEW-HOLE-NO-PAD  [SEW-HOLE-NO-PAD]  188.22,56.25 45 top
STANDOFF86  SEW-HOLE-NO-PAD  [SEW-HOLE-NO-PAD]  199,67.03 45 top
STANDOFF87  SEW-HOLE-NO-PAD  [SEW-HOLE-NO-PAD]  211.57,54.46 45 top
STANDOFF88  SEW-HOLE-NO-PAD  [SEW-HOLE-NO-PAD]  200.8,43.68 45 top
STANDOFF89  SEW-HOLE-NO-PAD  [SEW-HOLE-NO-PAD]  219.97,56.25 45 top
STANDOFF90  SEW-HOLE-NO-PAD  [SEW-HOLE-NO-PAD]  230.75,67.03 45 top
STANDOFF91  SEW-HOLE-NO-PAD  [SEW-HOLE-NO-PAD]  243.32,54.46 45 top
STANDOFF92  SEW-HOLE-NO-PAD  [SEW-HOLE-NO-PAD]  232.55,43.68 45 top
STANDOFF93  SEW-HOLE-NO-PAD  [SEW-HOLE-NO-PAD]  251.72,56.25 45 top
STANDOFF94  SEW-HOLE-NO-PAD  [SEW-HOLE-NO-PAD]  262.5,67.03 45 top
STANDOFF95  SEW-HOLE-NO-PAD  [SEW-HOLE-NO-PAD]  275.07,54.46 45 top
STANDOFF96  SEW-HOLE-NO-PAD  [SEW-HOLE-NO-PAD]  264.3,43.68 45 top
STANDOFF97  SEW-HOLE-NO-PAD  [SEW-HOLE-NO-PAD]  156.47,88 45 top
STANDOFF98  SEW-HOLE-NO-PAD  [SEW-HOLE-NO-PAD]  167.25,98.78 45 top
STANDOFF99  SEW-HOLE-NO-PAD  [SEW-HOLE-NO-PAD]  179.82,86.21 45 top
STANDOFF100  SEW-HOLE-NO-PAD  [SEW-HOLE-NO-PAD]  169.05,75.43 45 top
STANDOFF101  SEW-HOLE-NO-PAD  [SEW-HOLE-NO-PAD]  188.22,88 45 top
STANDOFF102  SEW-HOLE-NO-PAD  [SEW-HOLE-NO-PAD]  199,98.78 45 top
STANDOFF103  SEW-HOLE-NO-PAD  [SEW-HOLE-NO-PAD]  211.57,86.21 45 top
STANDOFF104  SEW-HOLE-NO-PAD  [SEW-HOLE-NO-PAD]  200.8,75.43 45 top
STANDOFF105  SEW-HOLE-NO-PAD  [SEW-HOLE-NO-PAD]  219.97,88 45 top
STANDOFF106  SEW-HOLE-NO-PAD  [SEW-HOLE-NO-PAD]  230.75,98.78 45 top
STANDOFF107  SEW-HOLE-NO-PAD  [SEW-HOLE-NO-PAD]  243.32,86.21 45 top
STANDOFF108  SEW-HOLE-NO-PAD  [SEW-HOLE-NO-PAD]  232.55,75.43 45 top
STANDOFF109  SEW-HOLE-NO-PAD  [SEW-HOLE-NO-PAD]  251.72,88 45 top
STANDOFF110  SEW-HOLE-NO-PAD  [SEW-HOLE-NO-PAD]  262.5,98.78 45 top
STANDOFF111  SEW-HOLE-NO-PAD  [SEW-HOLE-NO-PAD]  275.07,86.21 45 top
STANDOFF112  SEW-HOLE-NO-PAD  [SEW-HOLE-NO-PAD]  264.3,75.43 45 top
STANDOFF113  SEW-HOLE-NO-PAD  [SEW-HOLE-NO-PAD]  156.47,119.75 45 top
STANDOFF114  SEW-HOLE-NO-PAD  [SEW-HOLE-NO-PAD]  167.25,130.53 45 top
STANDOFF115  SEW-HOLE-NO-PAD  [SEW-HOLE-NO-PAD]  179.82,117.96 45 top
STANDOFF116  SEW-HOLE-NO-PAD  [SEW-HOLE-NO-PAD]  169.05,107.18 45 top
STANDOFF117  SEW-HOLE-NO-PAD  [SEW-HOLE-NO-PAD]  188.22,119.75 45 top
STANDOFF118  SEW-HOLE-NO-PAD  [SEW-HOLE-NO-PAD]  199,130.53 45 top
STANDOFF119  SEW-HOLE-NO-PAD  [SEW-HOLE-NO-PAD]  211.57,117.96 45 top
STANDOFF120  SEW-HOLE-NO-PAD  [SEW-HOLE-NO-PAD]  200.8,107.18 45 top
STANDOFF121  SEW-HOLE-NO-PAD  [SEW-HOLE-NO-PAD]  219.97,119.75 45 top
STANDOFF122  SEW-HOLE-NO-PAD  [SEW-HOLE-NO-PAD]  230.75,130.53 45 top
STANDOFF123  SEW-HOLE-NO-PAD  [SEW-HOLE-NO-PAD]  243.32,117.96 45 top
STANDOFF124  SEW-HOLE-NO-PAD  [SEW-HOLE-NO-PAD]  232.55,107.18 45 top
STANDOFF125  SEW-HOLE-NO-PAD  [SEW-HOLE-NO-PAD]  251.72,119.75 45 top
STANDOFF126  SEW-HOLE-NO-PAD  [SEW-HOLE-NO-PAD]  262.5,130.53 45 top
STANDOFF127  SEW-HOLE-NO-PAD  [SEW-HOLE-NO-PAD]  275.07,117.96 45 top
STANDOFF128  SEW-HOLE-NO-PAD  [SEW-HOLE-NO-PAD]  264.3,107.18 45 top
U1  MCP73831  [SOT23-5]  23.01,22.48 225 top
U2  MCP73831  [SOT23-5]  54.76,22.48 225 top
U3  MCP73831  [SOT23-5]  86.51,22.48 225 top
U4  MCP73831  [SOT23-5]  118.26,22.48 225 top
U5  MCP73831  [SOT23-5]  23.01,54.23 225 top
U6  MCP73831  [SOT23-5]  54.76,54.23 225 top
U7  MCP73831  [SOT23-5]  86.51,54.23 225 top
U8  MCP73831  [SOT23-5]  118.26,54.23 225 top
U9  MCP73831  [SOT23-5]  23.01,85.98 225 top
U10  MCP73831  [SOT23-5]  54.76,85.98 225 top
U11  MCP73831  [SOT23-5]  86.51,85.98 225 top
U12  MCP73831  [SOT23-5]  118.26,85.98 225 top
U13  MCP73831  [SOT23-5]  23.01,117.73 225 top
U14  MCP73831  [SOT23-5]  54.76,117.73 225 top
U15  MCP73831  [SOT23-5]  86.51,117.73 225 top
U16  MCP73831  [SOT23-5]  118.26,117.73 225 top
U17  MCP73831  [SOT23-5]  167.03,22.48 225 top
U18  MCP73831  [SOT23-5]  198.78,22.48 225 top
U19  MCP73831  [SOT23-5]  230.53,22.48 225 top
U20  MCP73831  [SOT23-5]  262.28,22.48 225 top
U21  MCP73831  [SOT23-5]  167.03,54.23 225 top
U22  MCP73831  [SOT23-5]  198.78,54.23 225 top
U23  MCP73831  [SOT23-5]  230.53,54.23 225 top
U24  MCP73831  [SOT23-5]  262.28,54.23 225 top
U25  MCP73831  [SOT23-5]  167.03,85.98 225 top
U26  MCP73831  [SOT23-5]  198.78,85.98 225 top
U27  MCP73831  [SOT23-5]  230.53,85.98 225 top
U28  MCP73831  [SOT23-5]  262.28,85.98 225 top
U29  MCP73831  [SOT23-5]  167.03,117.73 225 top
U30  MCP73831  [SOT23-5]  198.78,117.73 225 top
U31  MCP73831  [SOT23-5]  230.53,117.73 225 top
U32  MCP73831  [SOT23-5]  262.28,117.73 225 top
U$1  LOGO-LPLP  [LOGO-LILYPAD]  21.66,26.07 315 bottom
U$2  OSHW-LOGOS  [OSHW-LOGO-S]  57.68,23.6 315 bottom
U$3  LOGO-LPLP  [LOGO-LILYPAD]  53.41,26.07 315 bottom
U$4  OSHW-LOGOS  [OSHW-LOGO-S]  89.43,23.6 315 bottom
U$5  OSHW-LOGOS  [OSHW-LOGO-S]  25.93,23.6 315 bottom
U$6  LOGO-LPLP  [LOGO-LILYPAD]  85.16,26.07 315 bottom
U$7  OSHW-LOGOS  [OSHW-LOGO-S]  121.18,23.6 315 bottom
U$8  LOGO-LPLP  [LOGO-LILYPAD]  116.91,26.07 315 bottom
U$9  OSHW-LOGOS  [OSHW-LOGO-S]  25.93,55.35 315 bottom
U$10  LOGO-LPLP  [LOGO-LILYPAD]  21.66,57.82 315 bottom
U$11  OSHW-LOGOS  [OSHW-LOGO-S]  57.68,55.35 315 bottom
U$12  LOGO-LPLP  [LOGO-LILYPAD]  53.41,57.82 315 bottom
U$13  OSHW-LOGOS  [OSHW-LOGO-S]  89.43,55.35 315 bottom
U$14  LOGO-LPLP  [LOGO-LILYPAD]  85.16,57.82 315 bottom
U$15  OSHW-LOGOS  [OSHW-LOGO-S]  121.18,55.35 315 bottom
U$16  LOGO-LPLP  [LOGO-LILYPAD]  116.91,57.82 315 bottom
U$17  OSHW-LOGOS  [OSHW-LOGO-S]  25.93,87.1 315 bottom
U$18  LOGO-LPLP  [LOGO-LILYPAD]  21.66,89.57 315 bottom
U$19  OSHW-LOGOS  [OSHW-LOGO-S]  57.68,87.1 315 bottom
U$20  LOGO-LPLP  [LOGO-LILYPAD]  53.41,89.57 315 bottom
U$21  OSHW-LOGOS  [OSHW-LOGO-S]  89.43,87.1 315 bottom
U$22  LOGO-LPLP  [LOGO-LILYPAD]  85.16,89.57 315 bottom
U$23  OSHW-LOGOS  [OSHW-LOGO-S]  121.18,87.1 315 bottom
U$24  LOGO-LPLP  [LOGO-LILYPAD]  116.91,89.57 315 bottom
U$25  OSHW-LOGOS  [OSHW-LOGO-S]  25.93,118.85 315 bottom
U$26  LOGO-LPLP  [LOGO-LILYPAD]  21.66,121.32 315 bottom
U$27  OSHW-LOGOS  [OSHW-LOGO-S]  57.68,118.85 315 bottom
U$28  LOGO-LPLP  [LOGO-LILYPAD]  53.41,121.32 315 bottom
U$29  OSHW-LOGOS  [OSHW-LOGO-S]  89.43,118.85 315 bottom
U$30  LOGO-LPLP  [LOGO-LILYPAD]  85.16,121.32 315 bottom
U$31  OSHW-LOGOS  [OSHW-LOGO-S]  121.18,118.85 315 bottom
U$32  LOGO-LPLP  [LOGO-LILYPAD]  116.91,121.32 315 bottom
U$33  OSHW-LOGOS  [OSHW-LOGO-S]  169.94,23.6 315 bottom
U$34  LOGO-LPLP  [LOGO-LILYPAD]  165.68,26.07 315 bottom
U$35  OSHW-LOGOS  [OSHW-LOGO-S]  201.69,23.6 315 bottom
U$36  LOGO-LPLP  [LOGO-LILYPAD]  197.43,26.07 315 bottom
U$37  OSHW-LOGOS  [OSHW-LOGO-S]  233.44,23.6 315 bottom
U$38  LOGO-LPLP  [LOGO-LILYPAD]  229.18,26.07 315 bottom
U$39  OSHW-LOGOS  [OSHW-LOGO-S]  265.19,23.6 315 bottom
U$40  LOGO-LPLP  [LOGO-LILYPAD]  260.93,26.07 315 bottom
U$41  OSHW-LOGOS  [OSHW-LOGO-S]  169.94,55.35 315 bottom
U$42  LOGO-LPLP  [LOGO-LILYPAD]  165.68,57.82 315 bottom
U$43  OSHW-LOGOS  [OSHW-LOGO-S]  201.69,55.35 315 bottom
U$44  LOGO-LPLP  [LOGO-LILYPAD]  197.43,57.82 315 bottom
U$45  OSHW-LOGOS  [OSHW-LOGO-S]  233.44,55.35 315 bottom
U$46  LOGO-LPLP  [LOGO-LILYPAD]  229.18,57.82 315 bottom
U$47  OSHW-LOGOS  [OSHW-LOGO-S]  265.19,55.35 315 bottom
U$48  LOGO-LPLP  [LOGO-LILYPAD]  260.93,57.82 315 bottom
U$49  OSHW-LOGOS  [OSHW-LOGO-S]  169.94,87.1 315 bottom
U$50  LOGO-LPLP  [LOGO-LILYPAD]  165.68,89.57 315 bottom
U$51  OSHW-LOGOS  [OSHW-LOGO-S]  201.69,87.1 315 bottom
U$52  LOGO-LPLP  [LOGO-LILYPAD]  197.43,89.57 315 bottom
U$53  OSHW-LOGOS  [OSHW-LOGO-S]  233.44,87.1 315 bottom
U$54  LOGO-LPLP  [LOGO-LILYPAD]  229.18,89.57 315 bottom
U$55  OSHW-LOGOS  [OSHW-LOGO-S]  265.19,87.1 315 bottom
U$56  LOGO-LPLP  [LOGO-LILYPAD]  260.93,89.57 315 bottom
U$57  OSHW-LOGOS  [OSHW-LOGO-S]  169.94,118.85 315 bottom
U$58  LOGO-LPLP  [LOGO-LILYPAD]  165.68,121.32 315 bottom
U$59  OSHW-LOGOS  [OSHW-LOGO-S]  201.69,118.85 315 bottom
U$60  LOGO-LPLP  [LOGO-LILYPAD]  197.43,121.32 315 bottom
U$61  OSHW-LOGOS  [OSHW-LOGO-S]  233.44,118.85 315 bottom
U$62  LOGO-LPLP  [LOGO-LILYPAD]  229.18,121.32 315 bottom
U$63  OSHW-LOGOS  [OSHW-LOGO-S]  265.19,118.85 315 bottom
U$64  LOGO-LPLP  [LOGO-LILYPAD]  260.93,121.32 315 bottom

## Library data of the parts
C1-C64 = SparkFun-Capacitors; PROD_ID: CAP-08280
D1-D32 = SparkFun-LED; PROD_ID: DIO-09003
E$1 E$6 = SparkFun-Retired
E$2-E$5 FID1-FID64 JP5 JP9 JP14 JP19 JP24 JP29 JP34 JP39 JP44 JP49 JP54 JP59 JP64 JP69 JP74 JP79 JP84 JP89 JP94 JP99 JP104 JP109 JP114 JP119 JP124 JP129 JP134 JP139 JP144 JP149 JP154 JP159 U$2 U$4 U$5 U$7 U$9 U$11 U$13 U$15 U$17 U$19 U$21 U$23 U$25 U$27 U$29 U$31 U$33 U$35 U$37 U$39 U$41 U$43 U$45 U$47 U$49 U$51 U$53 U$55 U$57 U$59 U$61 U$63 = SparkFun-Aesthetics
JP1 JP6 JP11 JP16 JP21 JP26 JP31 JP36 JP41 JP46 JP51 JP56 JP61 JP66 JP71 JP76 JP81 JP86 JP91 JP96 JP101 JP106 JP111 JP116 JP121 JP126 JP131 JP136 JP141 JP146 JP151 JP156 = SparkFun-Connectors; PROD_ID: CONN-08352
JP2 JP3 JP7 JP8 JP12 JP13 JP17 JP18 JP22 JP23 JP27 JP28 JP32 JP33 JP37 JP38 JP42 JP43 JP47 JP48 JP52 JP53 JP57 JP58 JP62 JP63 JP67 JP68 JP72 JP73 JP77 JP78 JP82 JP83 JP87 JP88 JP92 JP93 JP97 JP98 JP102 JP103 JP107 JP108 JP112 JP113 JP117 JP118 JP122 JP123 JP127 JP128 JP132 JP133 JP137 JP138 JP142 JP143 JP147 JP148 JP152 JP153 JP157 JP158 U$1 U$3 U$6 U$8 U$10 U$12 U$14 U$16 U$18 U$20 U$22 U$24 U$26 U$28 U$30 U$32 U$34 U$36 U$38 U$40 U$42 U$44 U$46 U$48 U$50 U$52 U$54 U$56 U$58 U$60 U$62 U$64 = LilyPad-Wearables
JP4 JP10 JP15 JP20 JP25 JP30 JP35 JP40 JP45 JP50 JP55 JP60 JP65 JP70 JP75 JP80 JP85 JP90 JP95 JP100 JP105 JP110 JP115 JP120 JP125 JP130 JP135 JP140 JP145 JP150 JP155 JP160 = SparkFun-Connectors; PROD_ID: CONN-11752
R1 R3 R5 R7 R9 R11 R13 R15 R17 R19 R21 R23 R25 R27 R29 R31 R33 R35 R37 R39 R41 R43 R45 R47 R49 R51 R53 R55 R57 R59 R61 R63 = SparkFun-Resistors; PROD_ID: RES-00818
R2 R4 R6 R8 R10 R12 R14 R16 R18 R20 R22 R24 R26 R28 R30 R32 R34 R36 R38 R40 R42 R44 R46 R48 R50 R52 R54 R56 R58 R60 R62 R64 = SparkFun-Resistors; PROD_ID: RES-08296
S1-S32 = SparkFun-Electromechanical; PROD_ID: SWCH-08179
STANDOFF1-STANDOFF128 = Local Library
U1-U32 = SparkFun-PowerIC; PROD_ID: IC-09995

## Nets
GND: C1.2 C2.2 JP1.1 JP3.1 JP4.GND1 R4.1 U1.2
GND1: C3.2 C4.2 JP6.1 JP7.1 JP10.GND1 R2.1 U2.2
GND2: C5.2 C6.2 JP11.1 JP12.1 JP15.GND1 R6.1 U3.2
GND3: C7.2 C8.2 JP16.1 JP17.1 JP20.GND1 R8.1 U4.2
GND4: C9.2 C10.2 JP21.1 JP22.1 JP25.GND1 R10.1 U5.2
GND5: C11.2 C12.2 JP26.1 JP27.1 JP30.GND1 R12.1 U6.2
GND6: C13.2 C14.2 JP31.1 JP32.1 JP35.GND1 R14.1 U7.2
GND7: C15.2 C16.2 JP36.1 JP37.1 JP40.GND1 R16.1 U8.2
GND8: C17.2 C18.2 JP41.1 JP42.1 JP45.GND1 R18.1 U9.2
GND9: C19.2 C20.2 JP46.1 JP47.1 JP50.GND1 R20.1 U10.2
GND10: C21.2 C22.2 JP51.1 JP52.1 JP55.GND1 R22.1 U11.2
GND11: C23.2 C24.2 JP56.1 JP57.1 JP60.GND1 R24.1 U12.2
GND12: C25.2 C26.2 JP61.1 JP62.1 JP65.GND1 R26.1 U13.2
GND13: C27.2 C28.2 JP66.1 JP67.1 JP70.GND1 R28.1 U14.2
GND14: C29.2 C30.2 JP71.1 JP72.1 JP75.GND1 R30.1 U15.2
GND15: C31.2 C32.2 JP76.1 JP77.1 JP80.GND1 R32.1 U16.2
GND16: C33.2 C34.2 JP81.1 JP82.1 JP85.GND1 R34.1 U17.2
GND17: C35.2 C36.2 JP86.1 JP87.1 JP90.GND1 R36.1 U18.2
GND18: C37.2 C38.2 JP91.1 JP92.1 JP95.GND1 R38.1 U19.2
GND19: C39.2 C40.2 JP96.1 JP97.1 JP100.GND1 R40.1 U20.2
GND20: C41.2 C42.2 JP101.1 JP102.1 JP105.GND1 R42.1 U21.2
GND21: C43.2 C44.2 JP106.1 JP107.1 JP110.GND1 R44.1 U22.2
GND22: C45.2 C46.2 JP111.1 JP112.1 JP115.GND1 R46.1 U23.2
GND23: C47.2 C48.2 JP116.1 JP117.1 JP120.GND1 R48.1 U24.2
GND24: C49.2 C50.2 JP121.1 JP122.1 JP125.GND1 R50.1 U25.2
GND25: C51.2 C52.2 JP126.1 JP127.1 JP130.GND1 R52.1 U26.2
GND26: C53.2 C54.2 JP131.1 JP132.1 JP135.GND1 R54.1 U27.2
GND27: C55.2 C56.2 JP136.1 JP137.1 JP140.GND1 R56.1 U28.2
GND28: C57.2 C58.2 JP141.1 JP142.1 JP145.GND1 R58.1 U29.2
GND29: C59.2 C60.2 JP146.1 JP147.1 JP150.GND1 R60.1 U30.2
GND30: C61.2 C62.2 JP151.1 JP152.1 JP155.GND1 R62.1 U31.2
GND31: C63.2 C64.2 JP156.1 JP157.1 JP160.GND1 R64.1 U32.2
N$1: C2.1 JP1.2 S1.5 U1.3
N$2: C4.1 JP6.2 S2.5 U2.3
N$3: C1.1 JP4.VBUS1 R3.1 U1.4
N$4: D1.C U1.1
N$5: D1.A R3.2
N$6: C3.1 JP10.VBUS1 R1.1 U2.4
N$7: R4.2 U1.5
N$8: D2.C U2.1
N$9: D2.A R1.2
N$10: R2.2 U2.5
N$11: C6.1 JP11.2 S3.5 U3.3
N$12: C5.1 JP15.VBUS1 R5.1 U3.4
N$13: D3.C U3.1
N$14: D3.A R5.2
N$15: R6.2 U3.5
N$16: C8.1 JP16.2 S4.5 U4.3
N$17: C7.1 JP20.VBUS1 R7.1 U4.4
N$18: D4.C U4.1
N$19: D4.A R7.2
N$20: R8.2 U4.5
N$21: C10.1 JP21.2 S5.5 U5.3
N$22: C9.1 JP25.VBUS1 R9.1 U5.4
N$23: D5.C U5.1
N$24: D5.A R9.2
N$25: R10.2 U5.5
N$26: C12.1 JP26.2 S6.5 U6.3
N$27: C11.1 JP30.VBUS1 R11.1 U6.4
N$28: D6.C U6.1
N$29: D6.A R11.2
N$30: R12.2 U6.5
N$31: C14.1 JP31.2 S7.5 U7.3
N$32: C13.1 JP35.VBUS1 R13.1 U7.4
N$33: D7.C U7.1
N$34: D7.A R13.2
N$35: R14.2 U7.5
N$36: C16.1 JP36.2 S8.5 U8.3
N$37: C15.1 JP40.VBUS1 R15.1 U8.4
N$38: D8.C U8.1
N$39: D8.A R15.2
N$40: R16.2 U8.5
N$41: C18.1 JP41.2 S9.5 U9.3
N$42: C17.1 JP45.VBUS1 R17.1 U9.4
N$43: D9.C U9.1
N$44: D9.A R17.2
N$45: R18.2 U9.5
N$46: C20.1 JP46.2 S10.5 U10.3
N$47: C19.1 JP50.VBUS1 R19.1 U10.4
N$48: D10.C U10.1
N$49: D10.A R19.2
N$50: R20.2 U10.5
N$51: C22.1 JP51.2 S11.5 U11.3
N$52: C21.1 JP55.VBUS1 R21.1 U11.4
N$53: D11.C U11.1
N$54: D11.A R21.2
N$55: R22.2 U11.5
N$56: C24.1 JP56.2 S12.5 U12.3
N$57: C23.1 JP60.VBUS1 R23.1 U12.4
N$58: D12.C U12.1
N$59: D12.A R23.2
N$60: R24.2 U12.5
N$61: C26.1 JP61.2 S13.5 U13.3
N$62: C25.1 JP65.VBUS1 R25.1 U13.4
N$63: D13.C U13.1
N$64: D13.A R25.2
N$65: R26.2 U13.5
N$66: C28.1 JP66.2 S14.5 U14.3
N$67: C27.1 JP70.VBUS1 R27.1 U14.4
N$68: D14.C U14.1
N$69: D14.A R27.2
N$70: R28.2 U14.5
N$71: C30.1 JP71.2 S15.5 U15.3
N$72: C29.1 JP75.VBUS1 R29.1 U15.4
N$73: D15.C U15.1
N$74: D15.A R29.2
N$75: R30.2 U15.5
N$76: C32.1 JP76.2 S16.5 U16.3
N$77: C31.1 JP80.VBUS1 R31.1 U16.4
N$78: D16.C U16.1
N$79: D16.A R31.2
N$80: R32.2 U16.5
N$81: C34.1 JP81.2 S17.5 U17.3
N$82: C33.1 JP85.VBUS1 R33.1 U17.4
N$83: D17.C U17.1
N$84: D17.A R33.2
N$85: R34.2 U17.5
N$86: C36.1 JP86.2 S18.5 U18.3
N$87: C35.1 JP90.VBUS1 R35.1 U18.4
N$88: D18.C U18.1
N$89: D18.A R35.2
N$90: R36.2 U18.5
N$91: C38.1 JP91.2 S19.5 U19.3
N$92: C37.1 JP95.VBUS1 R37.1 U19.4
N$93: D19.C U19.1
N$94: D19.A R37.2
N$95: R38.2 U19.5
N$96: C40.1 JP96.2 S20.5 U20.3
N$97: C39.1 JP100.VBUS1 R39.1 U20.4
N$98: D20.C U20.1
N$99: D20.A R39.2
N$100: R40.2 U20.5
N$101: C42.1 JP101.2 S21.5 U21.3
N$102: C41.1 JP105.VBUS1 R41.1 U21.4
N$103: D21.C U21.1
N$104: D21.A R41.2
N$105: R42.2 U21.5
N$106: C44.1 JP106.2 S22.5 U22.3
N$107: C43.1 JP110.VBUS1 R43.1 U22.4
N$108: D22.C U22.1
N$109: D22.A R43.2
N$110: R44.2 U22.5
N$111: C46.1 JP111.2 S23.5 U23.3
N$112: C45.1 JP115.VBUS1 R45.1 U23.4
N$113: D23.C U23.1
N$114: D23.A R45.2
N$115: R46.2 U23.5
N$116: C48.1 JP116.2 S24.5 U24.3
N$117: C47.1 JP120.VBUS1 R47.1 U24.4
N$118: D24.C U24.1
N$119: D24.A R47.2
N$120: R48.2 U24.5
N$121: C50.1 JP121.2 S25.5 U25.3
N$122: C49.1 JP125.VBUS1 R49.1 U25.4
N$123: D25.C U25.1
N$124: D25.A R49.2
N$125: R50.2 U25.5
N$126: C52.1 JP126.2 S26.5 U26.3
N$127: C51.1 JP130.VBUS1 R51.1 U26.4
N$128: D26.C U26.1
N$129: D26.A R51.2
N$130: R52.2 U26.5
N$131: C54.1 JP131.2 S27.5 U27.3
N$132: C53.1 JP135.VBUS1 R53.1 U27.4
N$133: D27.C U27.1
N$134: D27.A R53.2
N$135: R54.2 U27.5
N$136: C56.1 JP136.2 S28.5 U28.3
N$137: C55.1 JP140.VBUS1 R55.1 U28.4
N$138: D28.C U28.1
N$139: D28.A R55.2
N$140: R56.2 U28.5
N$141: C58.1 JP141.2 S29.5 U29.3
N$142: C57.1 JP145.VBUS1 R57.1 U29.4
N$143: D29.C U29.1
N$144: D29.A R57.2
N$145: R58.2 U29.5
N$146: C60.1 JP146.2 S30.5 U30.3
N$147: C59.1 JP150.VBUS1 R59.1 U30.4
N$148: D30.C U30.1
N$149: D30.A R59.2
N$150: R60.2 U30.5
N$151: C62.1 JP151.2 S31.5 U31.3
N$152: C61.1 JP155.VBUS1 R61.1 U31.4
N$153: D31.C U31.1
N$154: D31.A R61.2
N$155: R62.2 U31.5
N$156: C64.1 JP156.2 S32.5 U32.3
N$157: C63.1 JP160.VBUS1 R63.1 U32.4
N$158: D32.C U32.1
N$159: D32.A R63.2
N$160: R64.2 U32.5
SINK1: S1.1 S1.2 S1.3
SINK2: S2.1 S2.2 S2.3
SINK3: S3.1 S3.2 S3.3
SINK4: S4.1 S4.2 S4.3
SINK5: S5.1 S5.2 S5.3
SINK6: S6.1 S6.2 S6.3
SINK7: S7.1 S7.2 S7.3
SINK8: S8.1 S8.2 S8.3
SINK9: S9.1 S9.2 S9.3
SINK10: S10.1 S10.2 S10.3
SINK11: S11.1 S11.2 S11.3
SINK12: S12.1 S12.2 S12.3
SINK13: S13.1 S13.2 S13.3
SINK14: S14.1 S14.2 S14.3
SINK15: S15.1 S15.2 S15.3
SINK16: S16.1 S16.2 S16.3
SINK17: S17.1 S17.2 S17.3
SINK18: S18.1 S18.2 S18.3
SINK19: S19.1 S19.2 S19.3
SINK20: S20.1 S20.2 S20.3
SINK21: S21.1 S21.2 S21.3
SINK22: S22.1 S22.2 S22.3
SINK23: S23.1 S23.2 S23.3
SINK24: S24.1 S24.2 S24.3
SINK25: S25.1 S25.2 S25.3
SINK26: S26.1 S26.2 S26.3
SINK27: S27.1 S27.2 S27.3
SINK28: S28.1 S28.2 S28.3
SINK29: S29.1 S29.2 S29.3
SINK30: S30.1 S30.2 S30.3
SINK31: S31.1 S31.2 S31.3
SINK32: S32.1 S32.2 S32.3
VCC: JP2.1 S1.4
VCC1: JP8.1 S2.4
VCC2: JP13.1 S3.4
VCC3: JP18.1 S4.4
VCC4: JP23.1 S5.4
VCC5: JP28.1 S6.4
VCC6: JP33.1 S7.4
VCC7: JP38.1 S8.4
VCC8: JP43.1 S9.4
VCC9: JP48.1 S10.4
VCC10: JP53.1 S11.4
VCC11: JP58.1 S12.4
VCC12: JP63.1 S13.4
VCC13: JP68.1 S14.4
VCC14: JP73.1 S15.4
VCC15: JP78.1 S16.4
VCC16: JP83.1 S17.4
VCC17: JP88.1 S18.4
VCC18: JP93.1 S19.4
VCC19: JP98.1 S20.4
VCC20: JP103.1 S21.4
VCC21: JP108.1 S22.4
VCC22: JP113.1 S23.4
VCC23: JP118.1 S24.4
VCC24: JP123.1 S25.4
VCC25: JP128.1 S26.4
VCC26: JP133.1 S27.4
VCC27: JP138.1 S28.4
VCC28: JP143.1 S29.4
VCC29: JP148.1 S30.4
VCC30: JP153.1 S31.4
VCC31: JP158.1 S32.4

## Tracks (layer width: path | path; a pad name or v marks a point on that pad's centre or on a via)
GND  (via drill 0.51)
  Top 0.203: 29.52,18.15 29.52,18.22 30.06,18.75 | 22.89,17.21 21.1,19 20.65,18.55 | 31.73,16 30.42,17.32
  Top 0.254: JP4.GND1 27.83,29.15 v27.83,29.1 | C1.2 23.42,17.21 22.89,17.21 | 29.52,18.15 30.35,17.32 30.42,17.32 | 31.73,16 JP3.1
  Bottom 0.203: v31.43,23.27 29.29,21.13 28.84,21.13 29.74,20.24 29.74,18.44 29.52,18.22 | 31.73,16 JP3.1
  Bottom 0.254: 25.48,24.5 25.48,24.05 v25.93,23.6
  other vias: 21.77,21.25 17.17,23.38 20.99,24.5
  pour Bottom (isolate 0.305): 4.37,23.6 24.13,3.85 43.89,23.6 24.13,43.36
  pour Top (isolate 0.305): 4.37,23.6 24.13,3.85 43.89,23.6 24.13,43.36
GND1  (via drill 0.51)